# Altium PCB EC200U-PCB.PcbDoc (part 1 of 2)
Units mm, origin at the board's own origin, x right, y up, seen from the top; angles counter-clockwise.
Board outline 86.99 x 89.42 mm, 2 copper layers (Top Layer, Bottom Layer); 142 components, 97 nets, 668 pads, 129 vias.
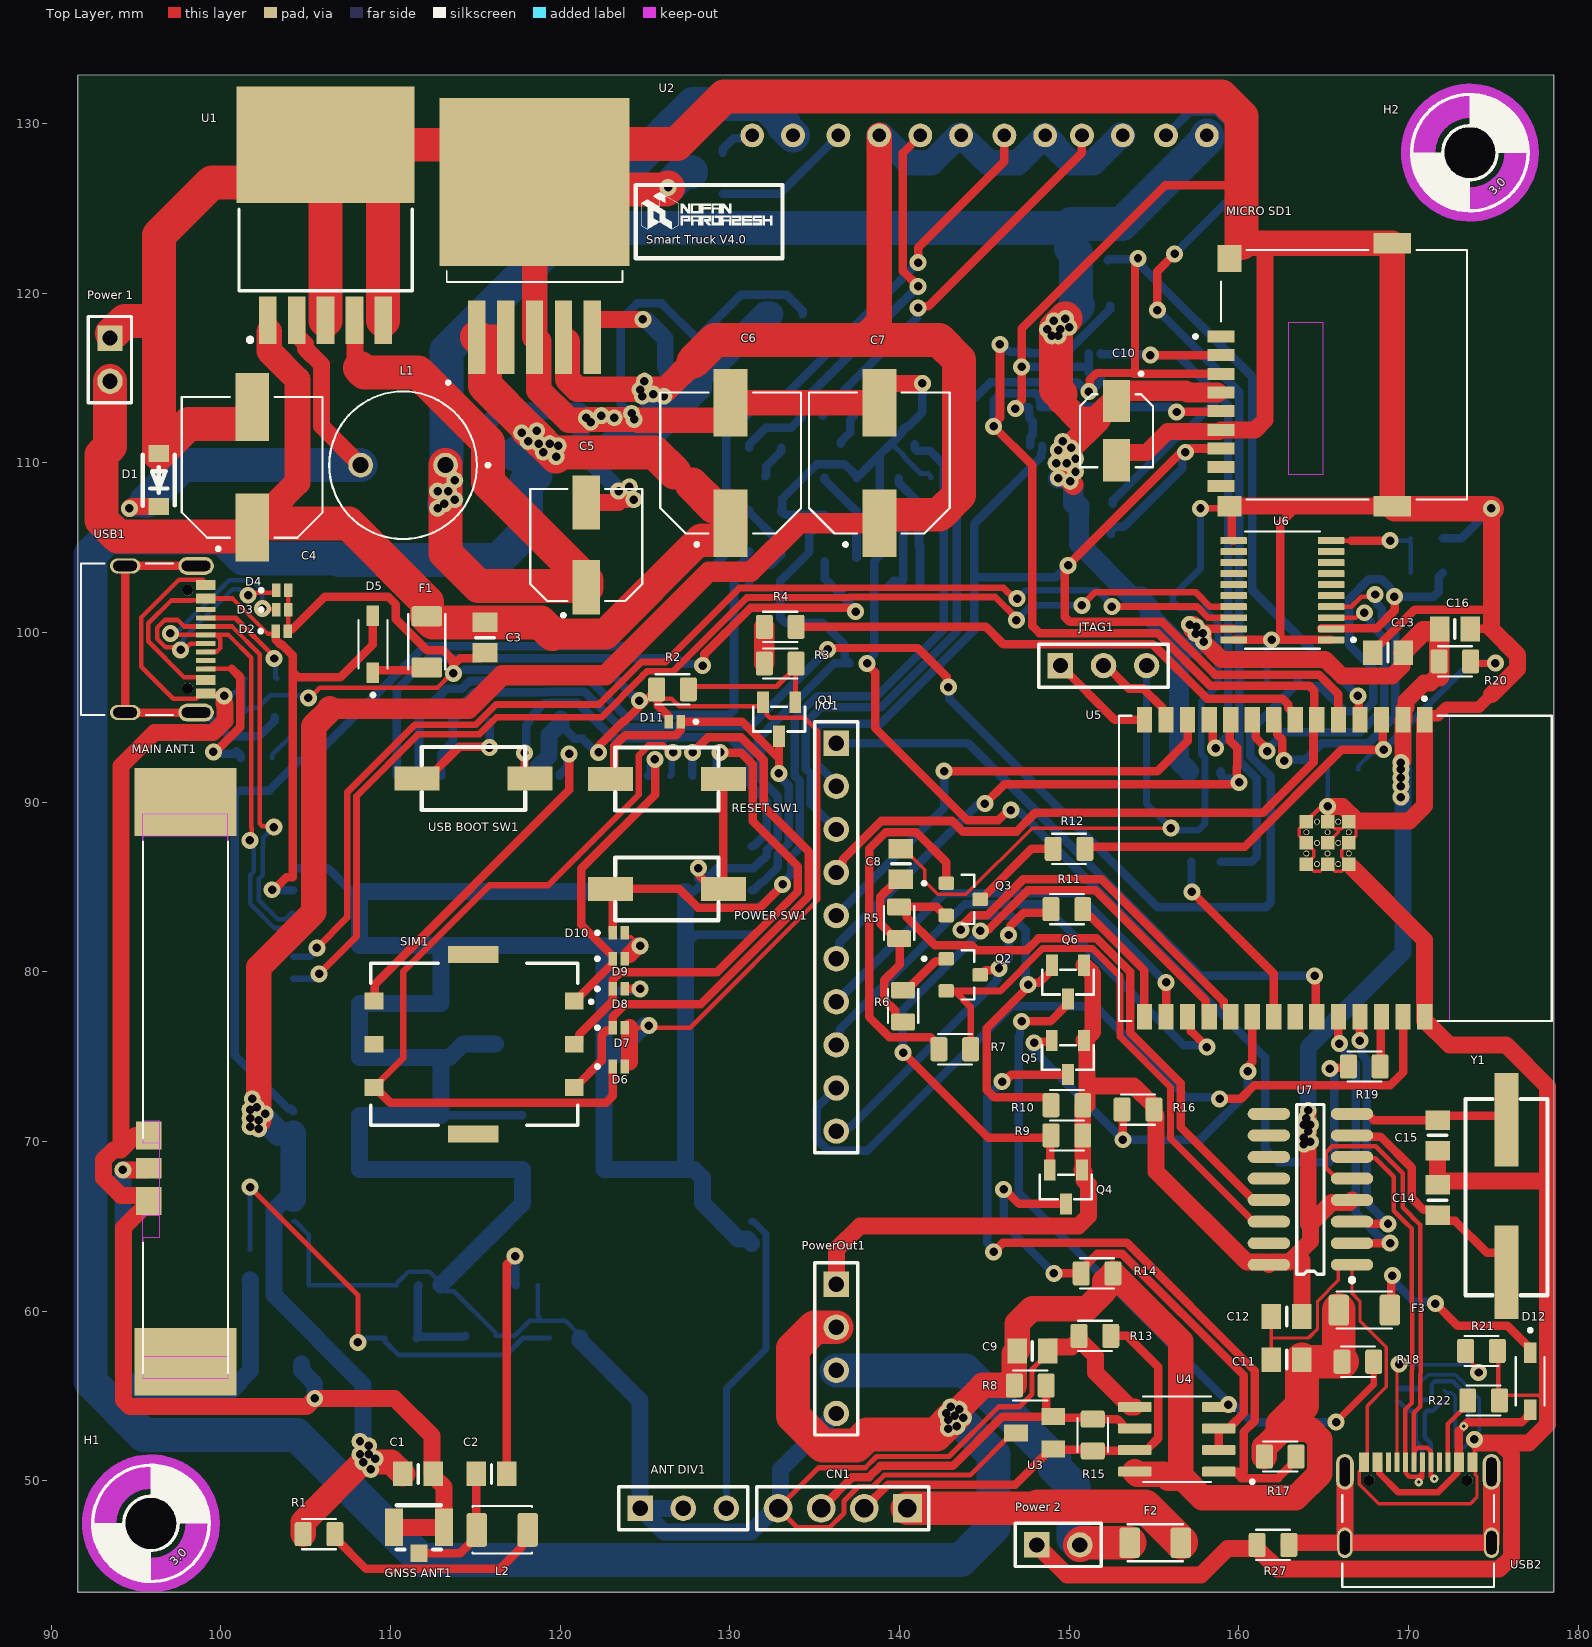
[diagram p0: Top Layer view]
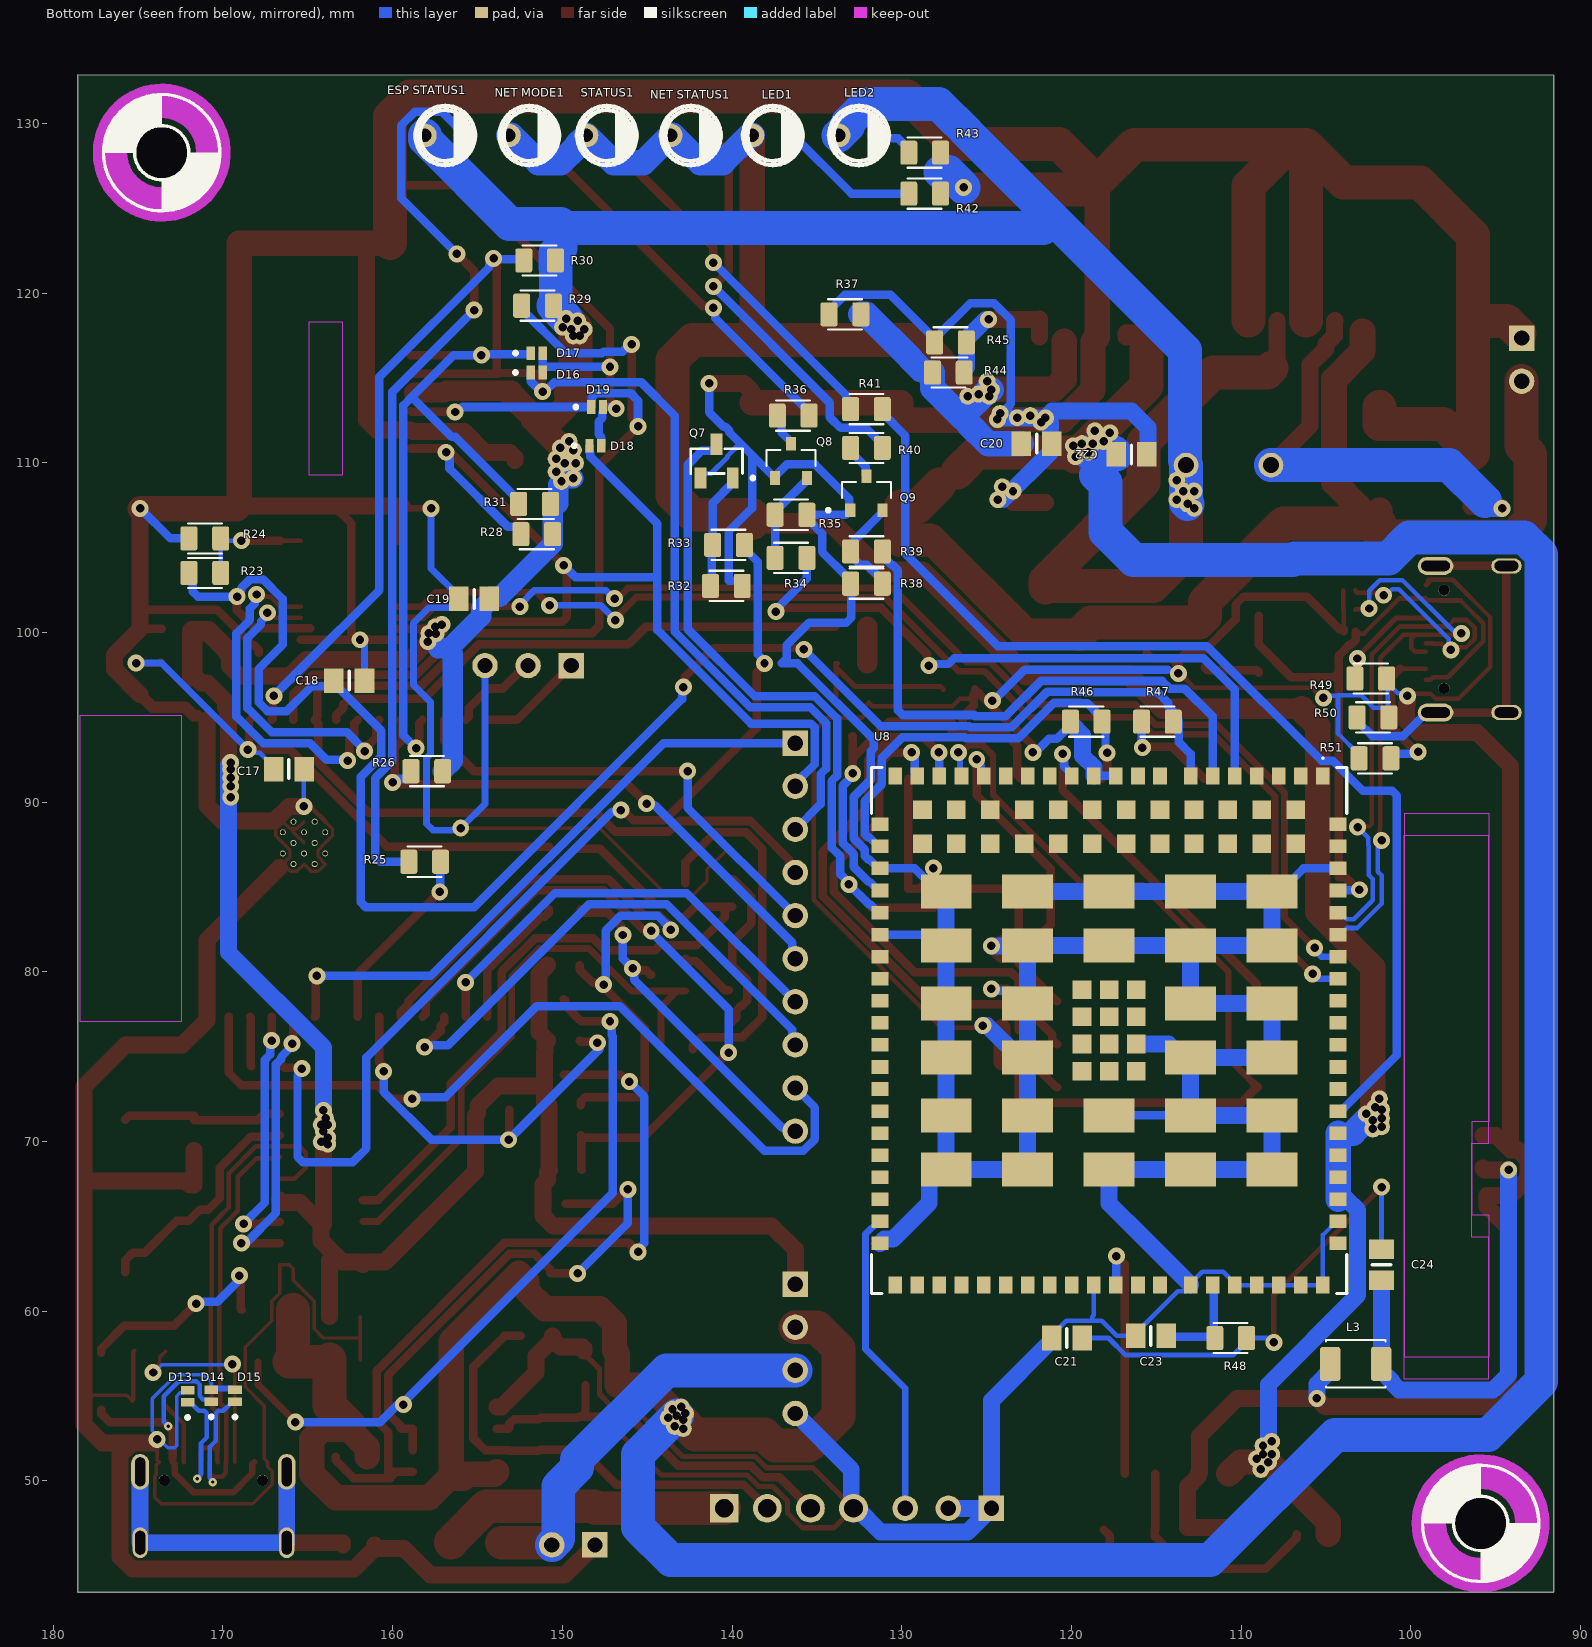
[diagram p1: Bottom Layer view, seen from below]
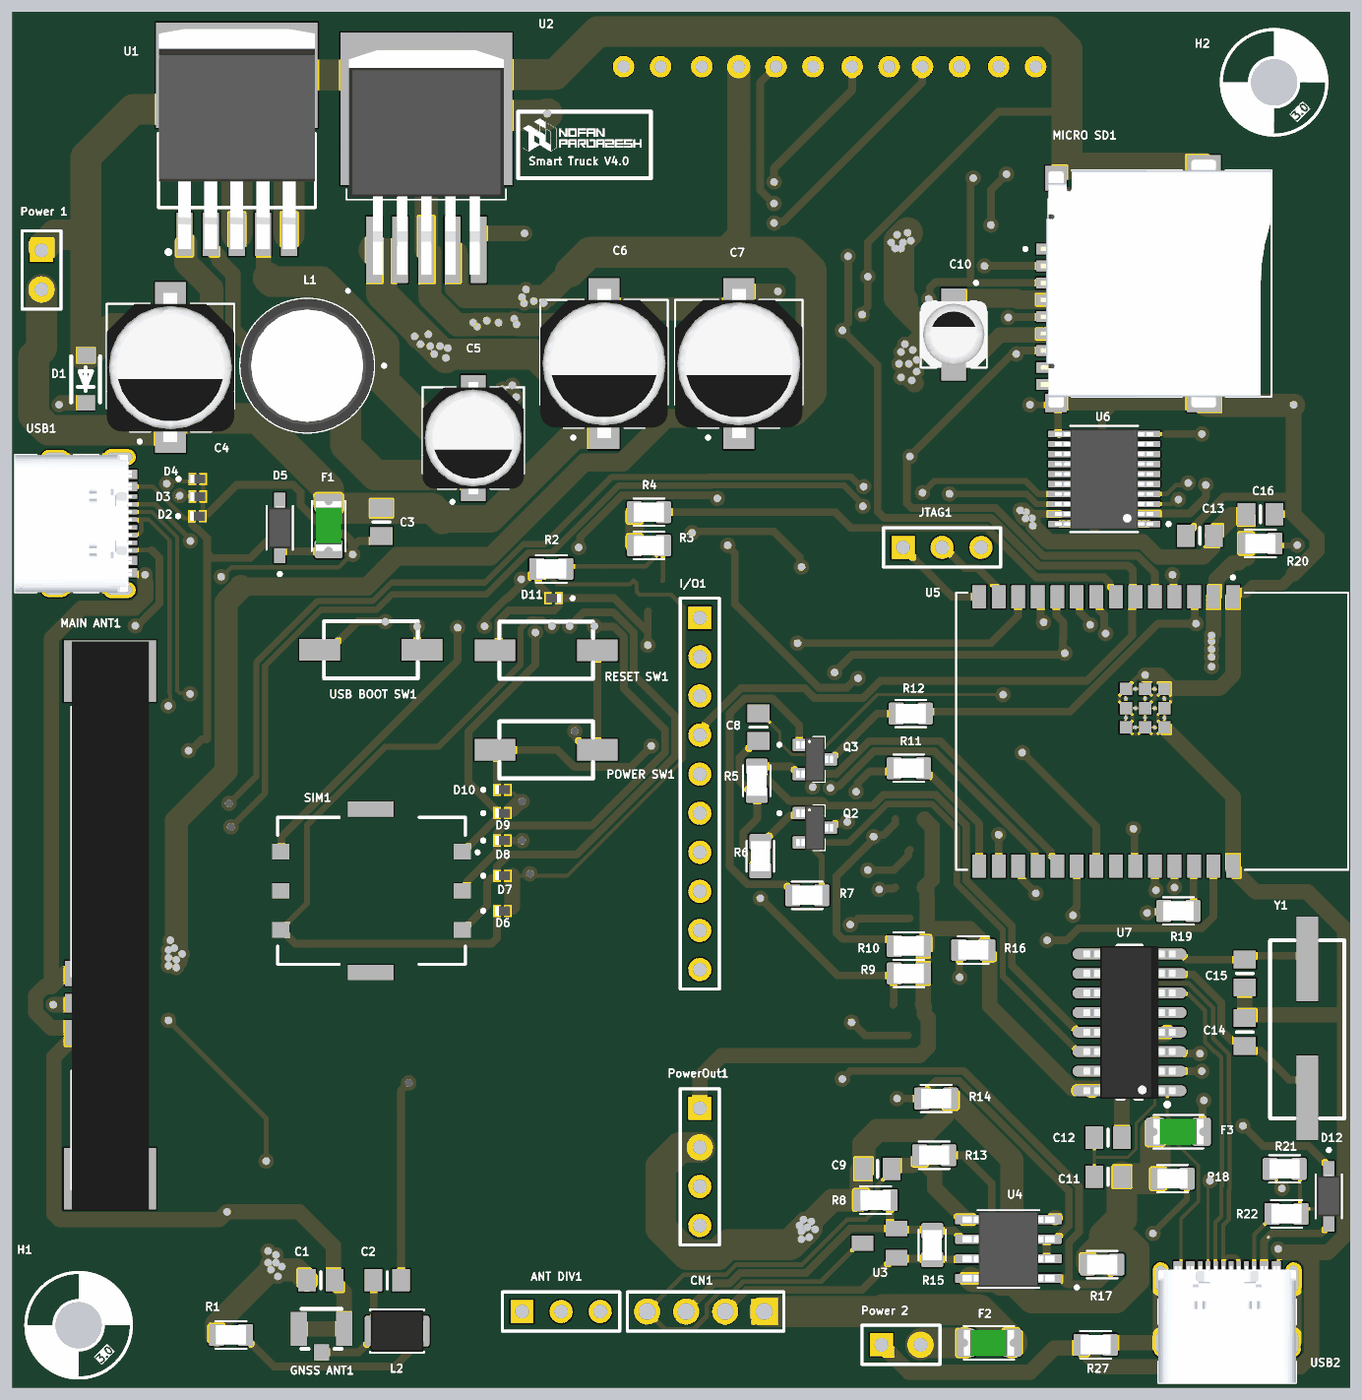
[diagram p3: 3D render of the assembled board from above, using the file's embedded part models]
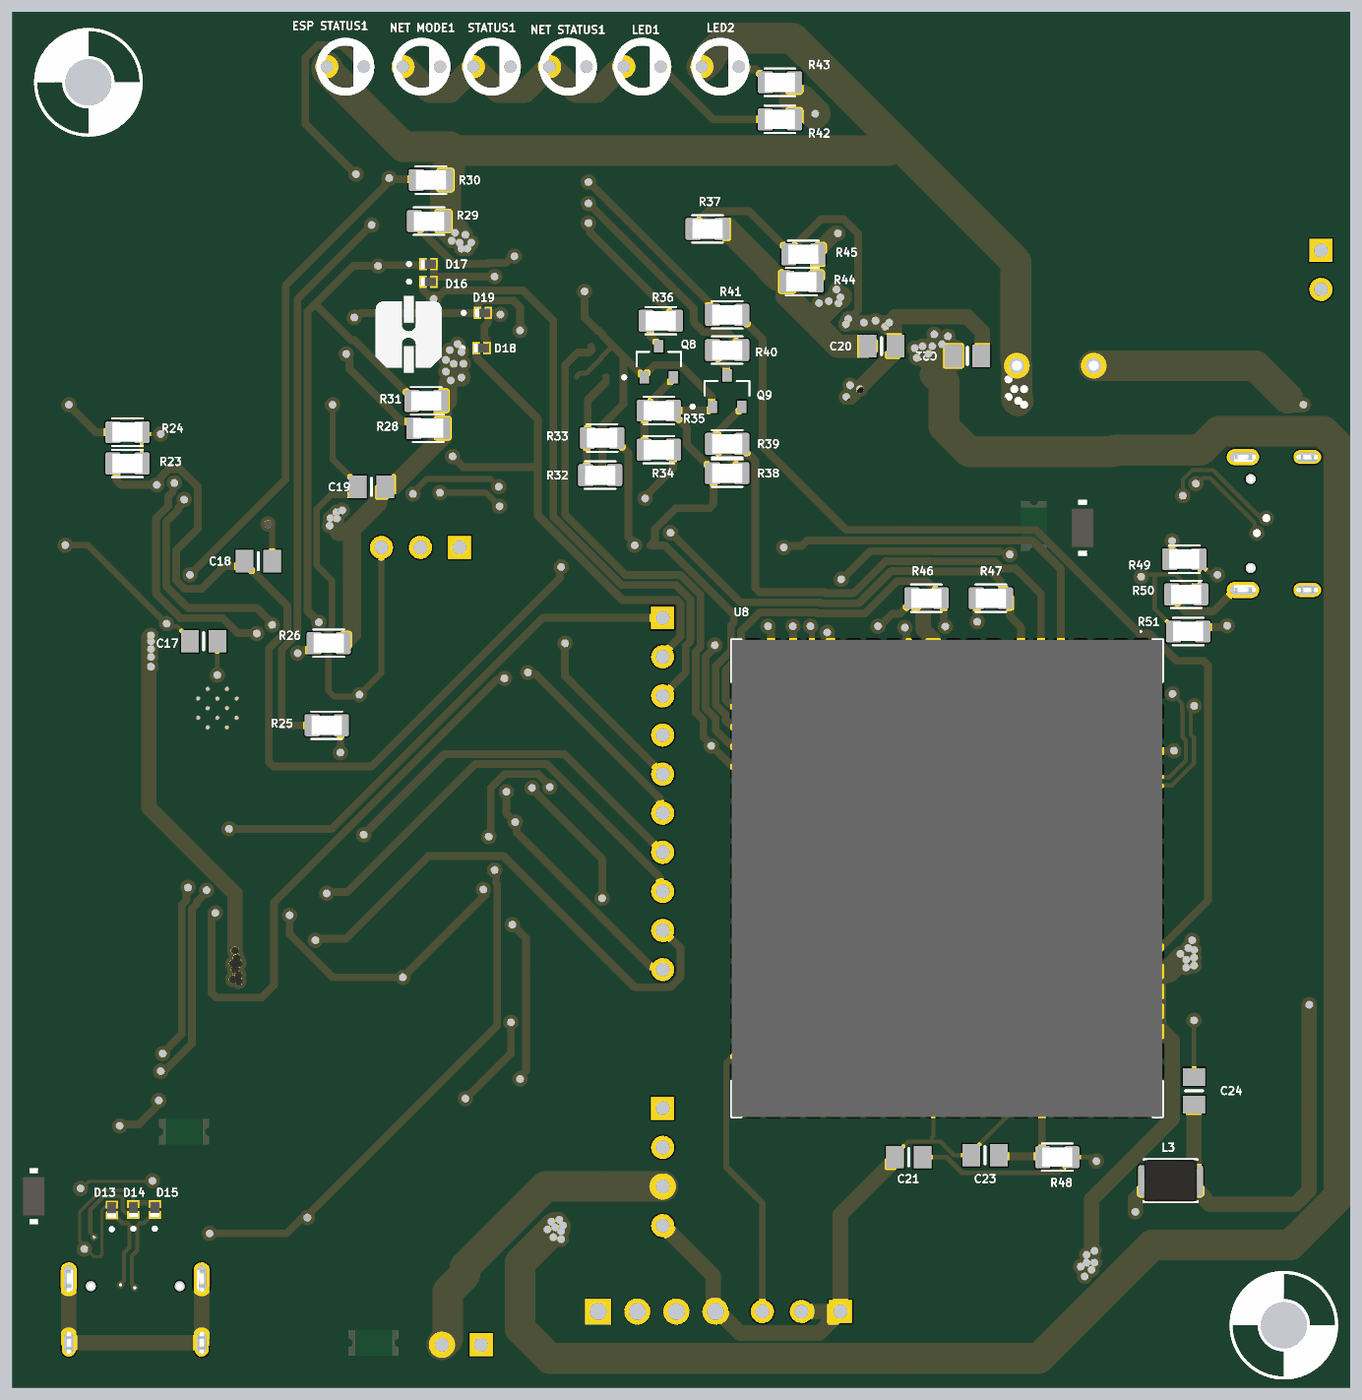
[diagram p4: 3D render of the assembled board from below, using the file's embedded part models]

## Layer stack, top to bottom
Top Solder: solder mask 0.0102, Solder Resist, Dk 3.5
Top Layer: signal copper 0.0356
Dielectric 1: dielectric 0.32, FR-4, Dk 4.8
Bottom Layer: signal copper 0.0356
Bottom Solder: solder mask 0.0102, Solder Resist, Dk 3.5

## Board outline
91.567,132.842 91.567,43.434 178.562,43.434 178.562,132.856

## Design rules (kind name [scope] priority, off if disabled: settings)
Clearance [All] p1: gap=0.15 ignorepadtopadclearanceinfootprint=FALSE except(0.5: Arc-Poly Track-Poly SMDPad-Poly THPad-Poly Via-Poly Fill-Poly Poly-Poly)
DiffPairsRouting [All] p1: maxlimit=0.254 minlimit=0.2 mostfreqgap=0.254 toplayer_minwidth=0.2 toplayer_maxwidth=0.381 toplayer_prefwidth=0.381 bottomlayer_minwidth=0.2 bottomlayer_maxwidth=0.381 bottomlayer_prefwidth=0.381 maxuncoupledlength=12.7
PolygonConnect [All] p1: connectstyle=Direct reliefconductorwidth=0.254 reliefentries=4 polygonreliefangle="90 Angle" airgapwidth=0.254
RoutingVias [All] p1: holewidth=0.5 width=1 viastyle="Through Hole" minholewidth=0.2 minwidth=0.5 maxholewidth=0.711 maxwidth=1.27
SolderMaskExpansion [All] p1: expansion=0.102 istentingtop=FALSE
Width [All] p1: maxlimit=5 minlimit=0.2 preferedwidth=0.267
29 further rules are at their usual default settings.

## Classes and differential pairs
component class "ec200u main": 2 3 4 5 6 7 "ANT DIV1" C1 C3 C4 C5 C6 C8 C11 C14 C15 C18 C20 C23 C33 C35 C37 C? CN1 D2 D4 D6 D10 D12 D14 D15 D16 D17 D18 D19 "ESP STATUS1" F3 "GNSS ANT1" H1 H2 I/O1 IC4 JTAG1 L1 L2 LED2 "MAIN ANT1" "MICRO SD1" "MICRO SD2" "NET STATUS1" "Power 2" "POWER SW1" PowerOut1 PT Q2 Q3 Q6 Q--272_-351 Q--272_-356 Q--272_-363 Q--281_541 Q--291_-335 R2 R3 R4 R6 R7 R10 R14 R15 R16 R17 R20 R24 R26 R28 R33 R36 R37 R39 R41 R42 R43 R44 R45 R46 R48 R50 R51 "RESET SW1" SIM1 STATUS1 U1 U3 U4 U5 U6 U8 USB1 "USB BOOT SW1" Y1 z
differential pair USB3: +USB3_P -USB3_N
differential pair USB2: +USB2_P -USB2_N

## Components (designator, comment, footprint, x,y, rotation, side; value= is the part's Value field where it differs from the comment)
"ANT DIV1" "DIV ANT" HDR1X3 124.714,48.387 r0 top
C1 ".1uF" CAPC2012X140N 111.633,50.419 r180 top (schematic designator C2)
C2 "100pF" CAPC2012X140N 115.951,50.419 r180 top (schematic designator C3)
C3 "10Uf" CAPC2012X140N 115.57,99.695 r90 top (schematic designator C24)
C4 "470uF" CAP_EEEFN1C471P 101.854,109.728 r90 top
C5 "220uF" CAP_EEEFT1C221AL 121.539,105.156 r90 top
C6 "470uF" CAP_EEEFN1C471P 130.048,109.982 r90 top (schematic designator C7)
C7 "470uF" CAP_EEEFN1C471P 138.811,109.982 r90 top (schematic designator C9)
C8 "" CAPC2012X140N 140.081,86.36 r90 top (schematic designator C14)
C9 "100NF" CAPC2012X140N 147.828,57.658 r180 top (schematic designator C6)
C10 "1uF" CAP_EEEFN1H100UR 152.781,111.887 r270 top (schematic designator C15)
C11 "10Uf" CAPC2012X140N 162.814,57.15 r0 top (schematic designator C19)
C12 "100nF" CAPC2012X140N 162.814,59.69 r0 top (schematic designator C18)
C13 "0.1UF" CAPC2012X140N 168.783,98.806 r180 top (schematic designator C12)
C14 "22pf" CAPC2012X140N 171.704,66.548 r90 top (schematic designator C20)
C15 "22pF" CAPC2012X140N 171.704,70.358 r90 top (schematic designator C21)
C16 "10UF" CAPC2012X140N 172.72,100.203 r0 top (schematic designator C13)
C17 "1UF" CAPC2012X140N 166.116,91.948 r180 bottom (schematic designator C11)
C18 "100nF" CAPC2012X140N 162.56,97.155 r0 bottom (schematic designator C16)
C19 "100nF" CAPC2012X140N 155.194,101.981 r180 bottom (schematic designator C17)
C20 "100nF" CAPC2012X140N 122.047,111.125 r0 bottom (schematic designator C10)
C21 "1uF 10V" CAPC2012X140N 120.269,58.42 r180 bottom (schematic designator C22)
C22 "100nF" CAPC2012X140N 116.459,110.49 r0 bottom (schematic designator C8)
C23 "1uF 10V" CAPC2012X140N 115.316,58.547 r180 bottom
C24 "3PF" CAPC2012X140N 101.727,62.738 r90 bottom (schematic designator C1)
CN1 "1759033" PCBComponent_1#1 137.008,48.362 r180 top
D1 "1n5822" PCBComponent_1#2 95.885,110.109 r90 top (schematic designator D3)
D2 "PESD5V0S1BL,315" DIO_PESD5V0S1UL,315 103.601,100.076 r0 top (schematic designator D19)
D3 "PESD5V0S1BL,315" DIO_PESD5V0S1UL,315 103.632,101.346 r0 top (schematic designator D18)
D4 "PESD5V0S1BL,315" DIO_PESD5V0S1UL,315 103.632,102.489 r0 top (schematic designator D17)
D5 "1N5819HW-7-F" SOD3715X145N 108.966,99.314 r90 top (schematic designator D16)
D6 "PESD5V0S1BL,315" DIO_PESD5V0S1UL,315 123.444,74.422 r0 top
D7 "PESD5V0S1BL,315" DIO_PESD5V0S1UL,315 123.444,76.708 r0 top (schematic designator D5)
D8 "PESD5V0S1BL,315" DIO_PESD5V0S1UL,315 123.444,78.994 r0 top (schematic designator D4)
D9 "PESD5V0S1BL,315" DIO_PESD5V0S1UL,315 123.444,80.772 r0 top (schematic designator D7)
D10 "PESD5V0S1BL,315" DIO_PESD5V0S1UL,315 123.444,82.296 r0 top (schematic designator D1)
D11 "PESD5V0S1BL,315" DIO_PESD5V0S1UL,315 126.746,94.742 r180 top (schematic designator D2)
D12 "1N5819HW-7-F" SOD3715X145N 177.165,55.88 r270 top
D13 "PESD5V0S1BL,315" DIO_PESD5V0S1UL,315 172.085,54.991 r90 bottom (schematic designator D14)
D14 "PESD5V0S1BL,315" DIO_PESD5V0S1UL,315 170.688,55.022 r90 bottom (schematic designator D15)
D15 "PESD5V0S1BL,315" DIO_PESD5V0S1UL,315 169.291,55.022 r90 bottom (schematic designator D13)
D16 "PESD5V0S1BL,315" DIO_PESD5V0S1UL,315 151.511,115.316 r180 bottom (schematic designator D10)
D17 "PESD5V0S1BL,315" DIO_PESD5V0S1UL,315 151.511,116.459 r180 bottom (schematic designator D11)
D18 "PESD5V0S1BL,315" DIO_PESD5V0S1UL,315 148.051,110.998 r180 bottom (schematic designator D8)
D19 "PESD5V0S1BL,315" DIO_PESD5V0S1UL,315 147.955,113.284 r180 bottom (schematic designator D9)
"ESP STATUS1" "Red" PCBComponent_1#3 156.718,129.413 r180 bottom
F1 "F=1.0 A" RESC3216X125N 112.141,99.441 r90 top (schematic designator F3)
F2 "F=4A" RESC3216X125N 155.067,46.355 r180 top (schematic designator F1)
F3 "F=1.0 A" RESC3216X125N 167.386,60.071 r180 top (schematic designator F2)
"GNSS ANT1" "U.FL-R-SMT-1_01_" PCBComponent_1#4 111.506,47.244 r0 top
H1 "HOLE" P3.0 95.885,47.498 r0 top
H2 "HOLE" P3.0 173.609,128.27 r0 top
I/O1 "Header 10" HDR1X10 136.271,93.472 r270 top (schematic designator I/O)
JTAG1 "Header 3" HDR1X3 149.479,98.044 r0 top (schematic designator JTAG)
L1 "DRC-V-822K" IND_DRC-V-821K 110.744,109.855 r180 top (schematic designator L3)
L2 "NLCV32T" INDM3225X240N 116.586,47.117 r0 top value=2µ2
L3 "6.8NH" INDM3225X240N 103.251,56.896 r180 bottom (schematic designator L1)
LED1 "Red" PCBComponent_1#3 137.414,129.413 r180 bottom (schematic designator LED2)
LED2 "Red" PCBComponent_1#3 132.334,129.413 r180 bottom (schematic designator LED1)
"MAIN ANT1" "ANT-LTE-CER-T" XDCR_ANT-LTE-CER-T 97.917,72.009 r270 top
"MICRO SD1" "Micro SD CARD HEADER" AMPHENOL_GTFP08131Y2HR 169.037,115.189 r90 top
"NET MODE1" "Red" PCBComponent_1#3 151.765,129.413 r180 bottom
"NET STATUS1" "Red" PCBComponent_1#3 142.24,129.413 r180 bottom
"Power 1" "Header 2" HDR1X2 93.472,117.348 r270 top (schematic designator "Power 2")
"Power 2" "Header 2" HDR1X2 148.082,46.228 r0 top (schematic designator "Power 1")
"POWER SW1" "Switch PB" PCBComponent_1#5 126.238,84.836 r180 top
PowerOut1 "Header 4" HDR1X4 136.271,61.595 r270 top (schematic designator PowerOut)
Q1 "BSS138" SOT-23-3_L2.9-W1.3-P1.90-LS2.4-BR#1 -288.661,-335.711 r90 top (schematic designator Q4)
Q2 "BC847B" TRANS_BC847B 143.748,79.822 r0 top (schematic designator Q8)
Q3 "BC847B" TRANS_BC847B 143.748,84.267 r0 top (schematic designator Q9)
Q4 "BSS138" SOT-23-3_L2.9-W1.3-P1.90-LS2.4-BR#1 -271.765,-363.27 r90 top (schematic designator Q5)
Q5 "BSS138" SOT-23-3_L2.9-W1.3-P1.90-LS2.4-BR#1 -271.643,-355.65 r90 top (schematic designator Q6)
Q6 "BSS138" SOT-23-3_L2.9-W1.3-P1.90-LS2.4-BR#1 -271.638,-351.205 r90 top (schematic designator Q7)
Q7 "BSS138" SOT-23-3_L2.9-W1.3-P1.90-LS2.4-BR#2 -280.655,540.689 r270 bottom (schematic designator Q3)
Q8 "S8050" TRANS_SS8050-G 136.525,110.109 r90 bottom (schematic designator Q2)
Q9 "S8050" TRANS_SS8050-G 132.08,108.204 r90 bottom (schematic designator Q1)
R1 "10" RESC2012X65N 105.791,46.863 r180 top (schematic designator R3)
R2 "47K" RESC2012X65N 126.619,96.647 r180 top (schematic designator R19)
R3 "47K" RESC2012X65N 132.969,98.171 r0 top (schematic designator R18)
R4 "0" RESC2012X65N 132.969,100.33 r180 top (schematic designator R30)
R5 "10K" RESC2012X65N 139.976,82.885 r90 top (schematic designator R36)
R6 "0" RESC2012X65N 140.208,77.978 r270 top (schematic designator R35)
R7 "10K" RESC2012X65N 143.256,75.438 r0 top (schematic designator R34)
R8 "10K" RESC2012X65N 147.701,55.626 r180 top (schematic designator R24)
R9 "10K" RESC2012X65N 149.86,70.358 r180 top (schematic designator R16)
R10 "1K" RESC2012X65N 149.86,72.136 r180 top (schematic designator R28)
R11 "0" RESC2012X65N 149.86,83.693 r0 top (schematic designator R33)
R12 "0" RESC2012X65N 149.987,87.249 r180 top (schematic designator R32)
R13 "10K" RESC2012X65N 151.511,58.547 r0 top (schematic designator R10)
R14 "10K" RESC2012X65N 151.638,62.23 r180 top (schematic designator R15)
R15 "120" RESC2012X65N 151.384,52.705 r90 top (schematic designator R17)
R16 "1K" RESC2012X65N 154.051,71.882 r180 top (schematic designator R26)
R17 "4.7K" RESC2012X65N 162.433,51.435 r0 top (schematic designator R11)
R18 "4.7K" RESC2012X65N 167.005,57.023 r0 top (schematic designator R13)
R19 "0" RESC2012X65N 167.386,74.422 r0 top (schematic designator R29)
R20 "10K" RESC2012X65N 172.72,98.298 r180 top (schematic designator R27)
R21 "5.1K" RESC2012X65N 174.29,57.658 r0 top (schematic designator R44)
R22 "5.1K" RESC2012X65N 174.417,54.737 r180 top (schematic designator R43)
R23 "10K" RESC2012X65N 171.069,103.505 r0 bottom (schematic designator R42)
R24 "120K" RESC2012X65N 171.069,105.537 r0 bottom (schematic designator R41)
R25 "330" RESC2012X65N 158.115,86.487 r180 bottom (schematic designator R22)
R26 "3.3K" RESC2012X65N 157.988,91.821 r0 bottom (schematic designator R31)
R27 "0" RESC2012X65N 162.006,46.228 r180 top (schematic designator R45)
R28 "4.7K" RESC2012X65N 151.511,105.791 r180 bottom (schematic designator R38)
R29 "4.7K" RESC2012X65N 151.465,119.253 r180 bottom (schematic designator R39)
R30 "4.7K" RESC2012X65N 151.338,121.92 r180 bottom (schematic designator R40)
R31 "4.7K" RESC2012X65N 151.638,107.569 r180 bottom (schematic designator R37)
R32 "47K" RESC2012X65N 140.335,102.743 r180 bottom (schematic designator R14)
R33 "47K" RESC2012X65N 140.208,105.156 r0 bottom (schematic designator R12)
R34 "4.7K" RESC2012X65N 136.525,104.394 r0 bottom (schematic designator R7)
R35 "47K" RESC2012X65N 136.525,106.934 r180 bottom (schematic designator R9)
R36 "2.2K" RESC2012X65N 136.398,112.776 r180 bottom (schematic designator R5)
R37 "330" RESC2012X65N 133.35,118.745 r180 bottom (schematic designator R21)
R38 "47K" RESC2012X65N 132.08,102.87 r0 bottom (schematic designator R6)
R39 "4.7K" RESC2012X65N 132.08,104.775 r0 bottom (schematic designator R4)
R40 "2.2K" RESC2012X65N 132.08,110.871 r180 bottom (schematic designator R2)
R41 "2.2K" RESC2012X65N 132.08,113.157 r0 bottom (schematic designator R1)
R42 "330" RESC2012X65N 128.651,125.857 r0 bottom (schematic designator R23)
R43 "330" RESC2012X65N 128.651,128.27 r0 bottom (schematic designator R8)
R44 "100K" RESC2012X65N 127.254,115.316 r0 bottom (schematic designator R20)
R45 "100K" RESC2012X65N 127.127,117.094 r180 bottom (schematic designator R25)
R46 "0" RESC2012X65N 119.126,94.742 r180 bottom (schematic designator R47)
R47 "4.7K" RESC2012X65N 114.935,94.742 r0 bottom (schematic designator R46)
R48 "0" RESC2012X65N 110.617,58.42 r0 bottom
R49 "5.1K" RESC2012X65N 102.362,97.282 r180 bottom (schematic designator R50)
R50 "0" RESC2012X65N 102.235,94.996 r180 bottom (schematic designator R51)
R51 "5.1K" RESC2012X65N 102.108,92.583 r180 bottom (schematic designator R49)
"RESET SW1" "Switch PB" PCBComponent_1#5 126.238,91.313 r180 top
SIM1 "SIM8051-6-0-14-00-X-REVD" PCBComponent_1#6 115.443,76.073 r90 top
STATUS1 "Red" PCBComponent_1#3 147.193,129.413 r180 bottom
U1 "LM2596S-3.3_NOPB" TO170P1435X465-6N 106.172,124.587 r90 top
U2 "MIC29302WU-TR" MIC29302WUTR 118.491,123.063 r0 top (schematic designator U3)
U3 "SM712" SOT23 147.955,52.832 r90 top (schematic designator U4)
U4 "MAX485" SOIC127P600X175-8N 156.337,52.451 r180 top (schematic designator U2)
U5 "ESP32-C6-WROOM-1-N8" XCVR_ESP32-C6-WROOM-1-N8 165.682,86.093 r270 top
U6 "TXS0108EPWR" SOP65P640X120-20N 162.56,102.489 r180 top
U7 "" SO16_M 164.211,67.183 r180 top (schematic designator U8)
U8 "EC200UCNAA-N05-SGNSA" EC200UCNAAN05SGNSA 117.78,76.543 r270 bottom (schematic designator U7)
USB1 "USB TYPE C 16 PIN" AMPHENOL_10155435-00011LF 94.364,99.599 r270 top (schematic designator USB2)
USB2 "USB TYPE C 16 PIN" AMPHENOL_10155435-00011LF 170.561,46.355 r0 top (schematic designator USB1)
"USB BOOT SW1" "Switch PB" PCBComponent_1#5 114.935,91.44 r0 top
Y1 "12 MHz" PCBComponent_1#7 176.022,66.675 r270 top

## Footprints (in the part's own frame and the unit in brackets; to place one, negate y for a bottom-side part, rotate by r counter-clockwise, add the part's x,y. Pads: shape width x height; smd on the part's side, far side on the other; paste and mask are expansions set on the pad)
AMPHENOL_10155435-00011LF [mm]
  rect 0.6x1.14 smd: A1_B12(-3.2,4.75) A4_B9(-2.4,4.75) B1_A12(3.2,4.75) B4_A9(2.4,4.75)
  rect 0.3x1.14 smd: A5(-1.25,4.75) A6(-0.25,4.75) A7(0.25,4.75) A8(1.25,4.75) B5(1.75,4.75) B6(0.75,4.75) B7(-0.75,4.75) B8(-1.75,4.75)
  oval 1.05x2.1 hole 0.6 slot 1.7 at 90 deg: SH1(-4.32,4.18) SH2(4.32,4.18)
  oval 0.9x1.8 hole 0.6 slot 1.4 at 90 deg: SH3(-4.32,0) SH4(4.32,0)
  round 0.65 hole 0.65 unplated: ""(-2.89,3.68) ""(2.89,3.68)
  silkscreen extent -4.47,-2.6 4.47,2.81, body extent -4.47,-2.6 4.47,5, height 3.26
AMPHENOL_GTFP08131Y2HR [mm]
  rect 0.7x1.6 smd: 1(2.25,10.1) 2(1.15,10.1) 3(0.05,10.1) 4(-1.05,10.1) 5(-2.15,10.1) 6(-3.25,10.1) 7(-4.35,10.1) 8(-5.45,10.1) CD(-6.55,10.1)
  rect 1.2x1.4 smd: 10(-7.75,9.6)
  rect 1.6x1.4 smd: 11(6.85,9.6)
  rect 1.2x2.2 smd: 12(-7.75,0) 13(7.75,0)
  Keep-Out Layer region: 3.1,4.1 -5.9,4.1 -5.9,6.1 3.1,6.1
  silkscreen extent -7.35,-4.4 7.35,11.7, body extent -8.05,-4.4 8.05,10.6, height 1.9
CAP_EEEFN1C471P [mm]
  rect 4x2 smd: 1(-3.55,0) 2(3.55,0)
  silkscreen extent -4.9,-4.15 4.15,4.15, body extent -4.85,-4.15 4.85,4.15, height 10.2
CAP_EEEFN1H100UR [mm]
  rect 2.5x1.6 smd: 1(-1.75,0) 2(1.75,0)
  silkscreen extent -3.45,-2.15 2.15,2.15, body extent -2.5,-2.15 2.5,2.15, height 5.3
CAP_EEEFT1C221AL [mm]
  rect 3.2x1.6 smd: 1(-2.5,0) 2(2.5,0)
  silkscreen extent -4.25,-3.3 3.3,3.3, body extent -3.65,-3.3 3.65,3.3, height 5.8
CAPC2012X140N [mm]
  rect 1.15x1.45 smd: 1(-0.9,0) 2(0.9,0)
  silkscreen extent 0,-0.55 0,0.55
DIO_PESD5V0S1UL,315 [mm]
  rect 0.5x0.8 smd paste-0.1 mask+0: 1(0.35,0) 2(-0.35,0)
  silkscreen extent -1.35,-0.1 -1.15,0.1, body extent -0.49,-0.29 0.49,0.29, height 0.5
EC200UCNAAN05SGNSA [mm]
  rect 1x0.8 smd: 1(-15,12.6) 2(-15,11.3) 3(-15,10) 4(-15,8.7) 5(-15,7.4) 6(-15,6.1) 7(-15,4.8) 8(-15,0.4) 9(-15,-0.9) 10(-15,-2.2) 11(-15,-3.5) 12(-15,-4.8) 13(-15,-6.1) 14(-15,-7.4) 15(-15,-8.7) 16(-15,-10) 17(-15,-11.3) 18(-15,-12.6) 37(15,-12.6) 38(15,-11.3) 39(15,-10) 40(15,-8.7) 41(15,-7.4) 42(15,-6.1) 43(15,-4.8) 44(15,-3.5) 45(15,-2.2) 46(15,-0.9) 47(15,0.4) 48(15,4.8) 49(15,6.1) 50(15,7.4) 51(15,8.7) 52(15,10) 53(15,11.3) 54(15,12.6) 141(-15,3) 142(-15,1.7) 143(15,1.7) 144(15,3)
  rect 0.8x1 smd: 19(-9.55,-13.5) 20(-8.25,-13.5) 21(-6.95,-13.5) 22(-5.65,-13.5) 23(-4.35,-13.5) 24(-3.05,-13.5) 25(-1.75,-13.5) 26(-0.45,-13.5) 27(0.85,-13.5) 28(2.15,-13.5) 29(3.45,-13.5) 30(4.75,-13.5) 31(6.05,-13.5) 32(7.35,-13.5) 33(8.65,-13.5) 34(9.95,-13.5) 35(11.25,-13.5) 36(12.55,-13.5) 55(12.55,13.5) 56(11.25,13.5) 57(9.95,13.5) 58(8.65,13.5) 59(7.35,13.5) 60(6.05,13.5) 61(4.75,13.5) 62(3.45,13.5) 63(2.15,13.5) 64(0.85,13.5) 65(-0.45,13.5) 66(-1.75,13.5) 67(-3.05,13.5) 68(-4.35,13.5) 69(-5.65,13.5) 70(-6.95,13.5) 71(-8.25,13.5) 72(-9.55,13.5) 113(-10.85,13.5) 114(-12.15,13.5) 115(-10.85,-13.5) 116(-12.15,-13.5)
  rect 1.1x1.1 smd: 73(2.4,1.6) 74(2.4,0) 75(2.4,-1.6) 76(0.8,1.6) 77(0.8,0) 78(0.8,-1.6) 79(-0.8,1.6) 80(-0.8,0) 81(-0.8,-1.6) 82(-2.4,1.6) 83(-2.4,0) 84(-2.4,-1.6) 117(-11,11) 118(-11,9) 119(-11,7) 120(-11,5) 121(-11,3) 122(-11,1) 123(-11,-1) 124(-11,-3) 125(-11,-5) 126(-11,-7) 127(-11,-9) 128(-11,-11) 129(-13,11) 130(-13,9) 131(-13,7) 132(-13,5) 133(-13,3) 134(-13,1) 135(-13,-1) 136(-13,-3) 137(-13,-5) 138(-13,-7) 139(-13,-9) 140(-13,-11)
  rect 2x3 smd: 85(8.2,9.6) 86(8.2,4.8) 87(8.2,0) 88(8.2,-4.8) 89(8.2,-9.6) 90(5,9.6) 91(5,4.8) 92(5,0) 93(5,-4.8) 94(5,-9.6) 95(1.6,9.6) 96(1.6,4.8) 97(1.6,-4.8) 98(1.6,-9.6) 99(-1.6,9.6) 100(-1.6,4.8) 101(-1.6,-4.8) 102(-1.6,-9.6) 103(-5,9.6) 104(-5,4.8) 105(-5,0) 106(-5,-4.8) 107(-5,-9.6) 108(-8.2,9.6) 109(-8.2,4.8) 110(-8.2,0) 111(-8.2,-4.8) 112(-8.2,-9.6)
  silkscreen extent -16.1,-14 15.5,14, body extent -15.5,-14 15.5,14, height 2.7
HDR1X2 [mm] "Connector; Header; 2 Position"
  rect 1.5x1.5 hole 0.9: 1(0,0)
  round 1.5 hole 0.9: 2(2.54,0)
  silkscreen extent -1.27,-1.27 3.81,1.27
HDR1X3 [mm] "Connector; Header; 3 Position"
  rect 1.5x1.5 hole 0.9: 1(0,0)
  round 1.5 hole 0.9: 2(2.54,0) 3(5.08,0)
  silkscreen extent -1.27,-1.27 6.35,1.27
HDR1X4 [mm] "Connector; Header; 4 Position"
  rect 1.5x1.5 hole 0.9: 1(0,0)
  round 1.5 hole 0.9: 2(2.54,0) 3(5.08,0) 4(7.62,0)
  silkscreen extent -1.27,-1.27 8.89,1.27
HDR1X10 [mm] "Connector; Header; 10 Position"
  rect 1.5x1.5 hole 0.9: 1(0,0)
  round 1.5 hole 0.9: 2(2.54,0) 3(5.08,0) 4(7.62,0) 5(10.16,0) 6(12.7,0) 7(15.24,0) 8(17.78,0) 9(20.32,0) 10(22.86,0)
  silkscreen extent -1.27,-1.27 24.13,1.27
IND_DRC-V-821K [mm]
  round 1.458 hole 0.95: 1(-2.5,0) 2(2.5,0)
  silkscreen extent -5.1,-4.35 4.35,4.35, body extent -4.35,-4.35 4.35,4.35, height 12.5
INDM3225X240N [mm] "Molded Inductor, 2-Leads, Body 3.2x2.5mm, IPC Medium Density"
  round 0.508 on Mech15: 0(0,0)
  rrect25% 1.2x2 smd: 1(-1.5,0) 2(1.5,0)
  silkscreen extent -1.75,-1.4 1.75,1.4, body extent -1.79,-1.35 1.79,1.35, height 2.4
MIC29302WUTR [mm]
  rect 1.02x4.318 smd: 1(-3.4,-5.664) 2(-1.7,-5.664) 3(0,-5.664) 4(1.7,-5.664) 5(3.4,-5.664)
  rect 11.176x9.906 smd: 6(0,3.482)
  silkscreen extent -5.18,-8.43 5.18,-1.74, body extent -5.03,-7.31 5.03,7.3, height 4.42
P3.0 [mm] "MOUNTING HOLE 3.0 mm with drill center"
  round 0 hole 3 unplated: MH(0,0)
  Keep-Out Layer circle w2.032: c0,0 r3.048
  silkscreen extent -3.43,-3.43 3.43,3.43
PCBComponent_1#1 [mm]
  rect 1.7x1.7 hole 1.1 paste+0 mask+0.051: 1(-3.454,-0.025)
  round 1.7 hole 1.1 paste+0 mask+0.051: 2(-0.914,-0.025) 3(1.626,-0.025) 4(4.166,-0.025)
  silkscreen extent -4.72,-1.3 5.44,1.24
PCBComponent_1#2 [mm]
  rect 1x1.2 smd paste+0 mask+0.051: A(0.425,-0.464) K(-2.675,-0.464)
  silkscreen extent -2.65,-1.4 0.37,0.48
PCBComponent_1#3 [mm]
  round 1.4 hole 0.8 paste+0 mask+0.051: 1(-1.387,-0.127) 2(1.016,-0.127)
  silkscreen extent -1.93,-1.88 1.57,1.62
PCBComponent_1#4 [mm]
  rect 1.05x2.2 smd paste+0 mask+0.051: 1(-1.306,0.018) 2(1.644,0.018)
  rect 1x1.05 smd paste+0 mask+0.051: 3(0.169,-1.507)
  silkscreen extent -1.13,-1.28 1.47,1.32
PCBComponent_1#5 [mm]
  rect 2.649x1.4 smd: 1(-3.374,-0.051) 2(3.28,-0.051)
  silkscreen extent -3.09,-1.91 3,1.8
PCBComponent_1#6 [mm]
  rect 1x1.1 smd paste+0 mask+0.051: C1(2.199,-5.385) C2(-0.341,-5.385) C3(-2.881,-5.385) C5(2.199,6.415) C6(-0.341,6.415) C7(-2.881,6.415)
  rect 1x3 smd paste+0 mask+0.051: MP1(4.959,0.565) MP2(-5.641,0.565)
  silkscreen extent -5.11,-6.48 4.43,6.62
PCBComponent_1#7 [mm]
  rect 5.5x1.4 smd paste+0 mask+0.051: 1(-4.616,-0.254) 2(4.384,-0.254)
  silkscreen extent -5.83,-2.67 5.73,2.16
RESC2012X65N [mm]
  rrect25% 1x1.42 smd: 1(-0.935,0) 2(0.935,0)
  silkscreen extent -1,-0.89 1,0.89, body extent -1,-0.63 1,0.63, height 0.6
RESC3216X125N [mm]
  rrect25% 1.2x1.82 smd: 1(-1.505,0) 2(1.505,0)
  silkscreen extent -1.63,-1.09 1.63,1.09, body extent -1.63,-0.82 1.63,0.82, height 0.43
SO16_M [mm]
  oval 2.5x0.7 smd: 1(-2.45,4.445) 2(-2.45,3.175) 3(-2.45,1.905) 4(-2.45,0.635) 5(-2.45,-0.635) 6(-2.45,-1.905) 7(-2.45,-3.175) 8(-2.45,-4.445) 9(2.45,-4.445) 10(2.45,-3.175) 11(2.45,-1.905) 12(2.45,-0.635) 13(2.45,0.635) 14(2.45,1.905) 15(2.45,3.175) 16(2.45,4.445)
  silkscreen extent -2.58,-5 0.8,5.47, body extent -3,-4.97 3,4.96, height 1.62
SOD3715X145N [mm]
  rect 1.21x0.73 smd: A(1.68,0) C(-1.68,0)
  silkscreen extent -3.1,-0.85 1.43,0.85, body extent -1.83,-0.77 1.83,0.77, height 0.8
SOIC127P600X175-8N [mm]
  rrect25% 1.97x0.59 smd: 1(-2.475,1.905) 2(-2.475,0.635) 3(-2.475,-0.635) 4(-2.475,-1.905) 5(2.475,-1.905) 6(2.475,-0.635) 7(2.475,0.635) 8(2.475,1.905)
  silkscreen extent -4.54,-2.52 2,2.59, body extent -3,-2.45 3,2.45, height 1.75
SOP65P640X120-20N [mm]
  rrect25% 1.57x0.41 smd: 1(-2.87,2.925) 2(-2.87,2.275) 3(-2.87,1.625) 4(-2.87,0.975) 5(-2.87,0.325) 6(-2.87,-0.325) 7(-2.87,-0.975) 8(-2.87,-1.625) 9(-2.87,-2.275) 10(-2.87,-2.925) 11(2.87,-2.925) 12(2.87,-2.275) 13(2.87,-1.625) 14(2.87,-0.975) 15(2.87,-0.325) 16(2.87,0.325) 17(2.87,0.975) 18(2.87,1.625) 19(2.87,2.275) 20(2.87,2.925)
  silkscreen extent -4.29,-3.45 2.2,3.45, body extent -3.2,-3.25 3.2,3.25, height 1.2
SOT23 [mm]
  rect 1x1.4 smd: 1(-0.95,-1.1) 2(0.95,-1.1) 3(0,1.1)
SOT-23-3_L2.9-W1.3-P1.90-LS2.4-BR#1 [mm]
  rect 1.25x0.7 smd: 1(431.596,-422.514) 2(431.596,-420.614) 3(429.597,-421.564)
  silkscreen extent 429.87,-423.09 431.32,-420.04
SOT-23-3_L2.9-W1.3-P1.90-LS2.4-BR#2 [mm]
  rect 1.25x0.7 smd: 1(431.596,-420.614) 2(431.596,-422.514) 3(429.597,-421.564)
  silkscreen extent 429.87,-423.09 431.32,-420.04
TO170P1435X465-6N [mm]
  rect 2.8x1.05 smd: 1(-6.2,3.4) 2(-6.2,1.7) 3(-6.2,0) 4(-6.2,-1.7) 5(-6.2,-3.4)
  rect 6.85x10.5 smd: 6(4.15,0)
  silkscreen extent -7.47,-5.1 0.35,5.1, body extent -7.16,-5.08 7.14,5.08, height 4.72
TRANS_BC847B [mm]
  rrect25% 0.9x0.8 smd: 1(-1,0.95) 2(-1,-0.95) 3(1,0)
  silkscreen extent -2.4,-1.45 0.65,1.45, body extent -1.2,-1.46 1.2,1.46, height 1.2
TRANS_SS8050-G [mm]
  rect 0.8x0.6 smd: 1(-1.01,-0.95) 2(-1.01,0.95) 3(1.01,0)
  silkscreen extent -1.11,-1.45 0.65,2.35
XCVR_ESP32-C6-WROOM-1-N8 [mm]
  rect 1.5x0.9 smd: 1(-8.75,5.26) 2(-8.75,3.99) 3(-8.75,2.72) 4(-8.75,1.45) 5(-8.75,0.18) 6(-8.75,-1.09) 7(-8.75,-2.36) 8(-8.75,-3.63) 9(-8.75,-4.9) 10(-8.75,-6.17) 11(-8.75,-7.44) 12(-8.75,-8.71) 13(-8.75,-9.98) 14(-8.75,-11.25) 15(8.75,-11.25) 16(8.75,-9.98) 17(8.75,-8.71) 18(8.75,-7.44) 19(8.75,-6.17) 20(8.75,-4.9) 21(8.75,-3.63) 22(8.75,-2.36) 23(8.75,-1.09) 24(8.75,0.18) 25(8.75,1.45) 26(8.75,2.72) 27(8.75,3.99) 28(8.75,5.26)
  rect 0.8x0.8 smd: 29_1(-2.755,0.79) 29_2(-1.505,0.79) 29_3(-0.255,0.79) 29_4(-2.755,-0.46) 29_5(-1.505,-0.46) 29_6(-0.255,-0.46) 29_7(-2.755,-1.71) 29_8(-1.505,-1.71) 29_9(-0.255,-1.71)
  round 0.35 hole 0.25 mask+0: 30_1(-2.13,0.79) 30_2(-0.88,0.79) 30_3(-2.755,0.165) 30_4(-1.505,0.165) 30_5(-0.255,0.165) 30_6(-2.13,-0.46) 30_7(-0.88,-0.46) 30_8(-2.755,-1.085) 30_9(-1.505,-1.085) 30_10(-0.255,-1.085) 30_11(-2.13,-1.71) 30_12(-0.88,-1.71)
  Keep-Out Layer region: 9,6.75 -9,6.75 -9,12.75 9,12.75
  silkscreen extent -10.1,-12.75 9,12.75
XDCR_ANT-LTE-CER-T [mm]
  rect 1.2x1.5 smd: 1(3.581,-2.159)
  rect 1.65x1.5 smd: 2(1.651,-2.159) 3(5.511,-2.159)
  rect 4x6 smd mask+0.102: 4(-18,0)
  rect 4x6 smd: 5(14.986,0)
  Keep-Out Layer region: 14.7,-2.524 6.35,-2.524 6.35,-1.524 0.82,-1.524 0.82,-2.524 -17.3,-2.524 -17.3,2.476 14.7,2.476
  Keep-Out Layer region: 16,-2.5 7.65,-2.5 7.65,-1.5 2.12,-1.5 2.12,-2.5 -16,-2.5 -16,2.5 16,2.5
  silkscreen extent -15.68,-2.5 15.68,2.5, body extent -19.94,-2.46 17.06,2.54, height 5.15

## Part data
"ANT DIV1": library part "Header 3", "Header, 3-Pin", LatestRevisionDate=17-Jul-2002, LatestRevisionNote="Re-released for DXP Platform.", Publisher="Altium Limited"
C1 C2 C9 C24: library part "CAP SMD 1206", "CAP 1206", Data=16-12-2016, Desc.="CAP SMD 1206", Designer="Abbas Basereh"
C3 C11 C12 C15 C18 C19 C20 C22: library part Cap-Bipolar, "Bipolar Capacitor", Voltage=100V, Adding Date=1387/12/20, Designer="Saeid Jorablo", Organazation=ControTec
C4 C5 C6 C7 C10: library part Cap-Polar, "Polar Capacitor", Voltage=16V, Adding Date=1387/12/20, Designer="Saeid Jorablo", Organazation=ControTec
C8 C13 C16 C17: library part LD055A561FAB2A, "T&R / COMMERCIAL CHIP", Package=None, Availability=Unavailable, MP=LD055A561FAB2A, Price=None
C14: library part CAP_Bipolar, "Bipolar Capacitor", Voltage=100V, Company="SJ Libraries", ComponentLink1Description=Datasheet, ComponentLink2Description=Reference, Designer="Eng. Saeid Jorablo", HelpURL=http://s3.picofile.com/file/7443264187/Coming_Soon_logo.gif, Publisher="SJ Unlimited", Status=Unreleased
C21 C23: library part "CAP SMD 1206", "10 V", Data=16-12-2016, Desc.="CAP SMD 1206", Designer="Abbas Basereh"
CN1: library part CON_Phoenix_MSTB_04, "4 Pitch: 5.08 mm Color: green Contact surface: Tin Assembly", Manufacturer="PHOENIX CONTACT", Max Current="12 A", Voltage="320 V", Category=Connector, ComponentLink1Description="Header, Nominal current: 12 A Rated voltage (III/2): 320 V Number of positions: 4 Pitch: 5.08 mm Color: green Contact surface: Tin Assembly: Soldering  DESIGNER:ABBAS BASEREH", ComponentLink2Description=Reference, Connector type="PCB Terminal Block", Designer="ABBAS BASEREH", Mounting Technology=Through-Hole, PART.NO=1759033, Pin Count=4, Positions=4, Revision 1=2017-3-1, Status=Unreleased
D1: library part "1n5822 SMD", "Schottky Rectifiers", Manufacturer="ON Semiconductor/Fairchild", Data=16-12-2016, Designer="Abbas Basereh", Link=https://www.aliexpress.com/item/Free-shipping-100pcs-1n5822-sma-smd-do-214ac-Schottky-diode-ss34/32337482329.html?spm=2114.01010208.3.1.zLZDsP&ws_ab_test=searchweb0_0,searchweb201602_4_10065_10068_10084_10083_10080_10082_10081_10060_10061_10062_10056_10055_10054_10059_10099_10078_10079_427_10073_10103_10102_10096_10052_10050_10051,searchweb201603_4&btsid=6e50dc92-ac69-45bc-a19e-209af19ce602, Part. No=SS34
D2 D3 D4 D6 D7 D8 D9 D10 D11 D13 D14 D15 D16 D17 D18 D19: "Diode ESD (Bi-directional)", Manufacturer_Name=Nexperia, Mouser Part Number=771-PESD5V0S1BL315, Arrow Part Number=PESD5V0S1BL,315, Arrow Price/Stock=https://www.arrow.com/en/products/pesd5v0s1bl315/nexperia, Datasheet Link=https://assets.nexperia.com/documents/data-sheet/PESD5V0S1BL.pdf, Height=0mm, Manufacturer_Part_Number=PESD5V0S1BL,315, Mouser Price/Stock=https://www.mouser.co.uk/ProductDetail/Nexperia/PESD5V0S1BL315?qs=LOCUfHb8d9vNKhGKXkjrvQ%3D%3D
D5 D12: "Diode Schottky 40 V 1A Surface Mount SOD-123", Package="SOD-123 Fairchild Semiconductor", Availability="In Stock", Check_prices=https://www.snapeda.com/parts/1N5819HW-7-F/Diodes+Inc./view-part/?ref=eda, MF="Diodes Inc.", MP=1N5819HW-7-F, Price=None, Purchase-URL=https://pricing.snapeda.com/search/part/1N5819HW-7-F/?ref=eda, SnapEDA_Link=https://www.snapeda.com/parts/1N5819HW-7-F/Diodes+Inc./view-part/?ref=snap
"ESP STATUS1" LED1 LED2 "NET MODE1" "NET STATUS1" STATUS1: library part LED, "5V OK", Adding Date=1387/12/22, Color=Red, Designer="Saeid Jorablo", Organazation=ControTec
  "ESP STATUS1" LED1 LED2 STATUS1: Size="SMD 1206"
  "NET MODE1": Size="NET MODE"
  "NET STATUS1": Size="NET STATUS"
F1 F2 F3: library part "Fuse 5x20 with holdeer pins", "Fuses 5x20", Data=28-12-2016, Desc.="fuse with holder pins 5x20", Designer="Abbas Basereh"
H1 H2: library part MOUNT-HOLE, "MOUNTING HOLE with drill center marker"
I/O1: "Header, 10-Pin", LatestRevisionDate=17-Jul-2002, LatestRevisionNote="Re-released for DXP Platform.", Publisher="Altium Limited"
JTAG1: "Header, 3-Pin", LatestRevisionDate=17-Jul-2002, LatestRevisionNote="Re-released for DXP Platform.", Publisher="Altium Limited"
L1: "Radial Inductor with Leads,8200ÂµH, 0.13A,Q>20", Package=None, Availability="In Stock", Check_prices=https://www.snapeda.com/parts/DRC-V-822K/Bel+Fuse/view-part/?ref=eda, MF="Bel Fuse", MP=DRC-V-822K, Price=None, Purchase-URL=https://pricing.snapeda.com/search/part/DRC-V-822K/?ref=eda, SnapEDA_Link=https://www.snapeda.com/parts/DRC-V-822K/Bel+Fuse/view-part/?ref=snap
L2: library part INDC_2u2_1210_1200mA, "Inductor 2.2uH 1.2A 1210 SMD chip", DC Resistance (DCR)="115 mOhm", Frequency - Self Resonant=68MHz, Frequency - Test=7.96MHz, Manufacturer 1="TDK Corporation", Manufacturer Part Number 1=NLCV32T-2R2M-PFR, Operating Temperature="-40°C ~ 125°C", Package / Case="1210 (3225 Metric)", Q @ Freq="15 @ 7.96MHz", Ratings="1.2 Adc", Supplier Part Number 1=445-3650-1-ND, Tolerance=±20%, ComponentLink1Description=http://www.tdk.co.jp/tefe02/e511_nlcv_nlc.pdf, ComponentLink1URL=http://www.tdk.co.jp/tefe02/e511_nlcv_nlc.pdf, SCDType=source, Supplier 1=Digi-Key, Type="Ferrite Core"
L3: library part INDC_2u2_1210_1200mA, DC Resistance (DCR)="115 mOhm", Frequency - Self Resonant=68MHz, Frequency - Test=7.96MHz, Manufacturer 1="TDK Corporation", Manufacturer Part Number 1=NLCV32T-2R2M-PFR, Operating Temperature="-40°C ~ 125°C", Package / Case="1210 (3225 Metric)", Q @ Freq="15 @ 7.96MHz", Ratings="1.2 Adc", Supplier Part Number 1=445-3650-1-ND, Tolerance=±20%, ComponentLink1Description=http://www.tdk.co.jp/tefe02/e511_nlcv_nlc.pdf, ComponentLink1URL=http://www.tdk.co.jp/tefe02/e511_nlcv_nlc.pdf, SCDType=source, Supplier 1=Digi-Key, Type="Ferrite Core"
"MAIN ANT1": "Cellular Multiband Monopole Ceramic Chip Antenna", Package=None, Availability="In Stock", Check_prices=https://www.snapeda.com/parts/ANT-LTE-CER-T/Linx%20Technologies%20Inc./view-part/2769557/?ref=eda, MF="Linx Technologies", MP=ANT-LTE-CER-T, Price=None, SnapEDA_Link=https://www.snapeda.com/parts/ANT-LTE-CER-T/Linx%20Technologies%20Inc./view-part/2769557/?ref=snap
"MICRO SD1": library part "CON_Micro SD", "Secure Digital Card Socket", Max Current=mA, Category=Connector, Company="SJ Libraries", ComponentLink1Description=Datasheet, ComponentLink2Description=Reference, Connector type=Header, Designer="Eng. Saeid Jorablo", HelpURL=http://s3.picofile.com/file/7443264187/Coming_Soon_logo.gif, Mounting Technology="Surface Mount", Pin Count=13, Publisher="SJ UnLimited", Status=Unreleased, Update=7/8/2012
"Power 1" "Power 2": "Header, 2-Pin", LatestRevisionDate=17-Jul-2002, LatestRevisionNote="Re-released for DXP Platform.", Publisher="Altium Limited"
"POWER SW1" "RESET SW1" "USB BOOT SW1": "Push Button Switch"
PowerOut1: "Header, 4-Pin", LatestRevisionDate=17-Jul-2002, LatestRevisionNote="Re-released for DXP Platform.", Publisher="Altium Limited"
Q1 Q4 Q5 Q6 Q7: "N-Channel 50V 220mA (Ta) 360mW (Ta) Surface Mount SOT-23-3", Package=None, Availability=Unavailable, MP=BSS138, Price=None
Q2 Q3: "BJT, SOT-23, 45V, 100mA, NPN, 0.25W, 150C", Package="SOT-23-3 Diotec", Check_prices=https://www.snapeda.com/parts/BC847B/Diotec/view-part/?ref=eda, MF="Diotec Semiconductor", MP=BC847B, SnapEDA_Link=https://www.snapeda.com/parts/BC847B/Diotec/view-part/?ref=snap
Q8 Q9: library part SMD-TRANSISTORS-NPN-25V-500MW(SOT-23), "305010017", Package=None, Availability=Unavailable, MP=S8050, Price=None
R1 R48: library part "RES 1206 0.25W", "RES 1206", Data=16-12-2016, Desc.="RES SMD 1206", Designer="Abbas Basereh"
R2 R3 R8 R9 R10 R13 R14 R15 R16 R17 R18 R21 R22 R23 R24 R25 R27 R28 R29 R30 R31 R32 R33 R34 R35 R36 R37 R38 R39 R40 R41 R42 R43 R44 R45 R46 R47 R49 R50 R51: library part "RES Axial 0.5W", "RES Axial 0.5W", Data=4-1-2017, Desc.="RES Axial 0.5W", Designer="Abbas Basereh"
R4 R5 R6 R7 R11 R12 R19 R20 R26: library part 2-2176053-0, "RES 0.33 OHM 1% 1/4W 0805", Package=0805, Power_Rating=".25 W", Resistance=.33, Tolerance=1%, Availability="In Stock", Check_prices=https://www.snapeda.com/parts/2-2176053-0/TE+Connectivity/view-part/?ref=eda, EU_RoHS_Compliance="Compliant with Exemptions", MF="TE Connectivity", MP=2-2176053-0, Price=None, SnapEDA_Link=https://www.snapeda.com/parts/2-2176053-0/TE+Connectivity/view-part/?ref=snap
SIM1: "Nano SIM Card Connector, Push-Pull Type, 6 Pin, SMT, Profile 1.35mm", Package=None, Availability=Unavailable, MP=SIM8051-6-0-14-00-X-REVD, Price=None
U1: "Integrated Circuit", Arrow Part Number=LM2596S-3.3/NOPB, Manufacturer_Name="Texas Instruments", Mouser Part Number=926-LM2596S-3.3/NOPB, Arrow Price/Stock=https://www.arrow.com/en/products/lm2596s-3.3nopb/texas-instruments?region=nac, Datasheet Link=http://www.ti.com/lit/ds/symlink/lm2596.pdf, Height=4.65mm, Manufacturer_Part_Number=LM2596S-3.3/NOPB, Mouser Price/Stock=https://www.mouser.co.uk/ProductDetail/Texas-Instruments/LM2596S-3.3-NOPB?qs=X1J7HmVL2ZHsEwG9Q6doow%3D%3D
U2: "Integrated Circuit", Manufacturer_Name=Microchip, Mouser Part Number=998-MIC29302WUTR, Arrow Part Number=MIC29302WU-TR, Arrow Price/Stock=https://www.arrow.com/en/products/mic29302wu-tr/microchip-technology?region=nac, Datasheet Link=http://ww1.microchip.com/downloads/en/DeviceDoc/20005685A.pdf, Height=4.597mm, Manufacturer_Part_Number=MIC29302WU-TR, Mouser Price/Stock=https://www.mouser.co.uk/ProductDetail/Microchip-Technology/MIC29302WU-TR?qs=U6T8BxXiZAWR9%2FgJIuiMuA%3D%3D
U3: "31V, 19V Clamp 19A _8/20Âµs_ Ipp Tvs Diode Surface Mount SOT-23-3", Package="SOT-23 Semtech", Availability=Unavailable, MF=Semtech, MP=SM712, Price=None, SnapEDA_Link=https://www.snapeda.com/parts/SM712/Semtech/view-part/4219095/?ref=snap
U4: "1/1 Transceiver Half RS422, RS485 8-SOIC", Package="SOIC-8 Maxim Integrated", Digi-Key_Part_Number=MAX485CSA+TCT-ND, Digi-Key_Purchase_URL=https://www.digikey.com/product-detail/en/maxim-integrated/MAX485CSA-T/MAX485CSA-TCT-ND/3894816?utm_source=snapeda&utm_medium=aggregator&utm_campaign=symbol, MF="Maxim Integrated", MP=MAX485, SnapEDA_Link=https://www.snapeda.com/parts/MAX485/Maxim%20Integrated/view-part/493689/?ref=snap
U5: "Multiprotocol Modules ESP32-C6 module, Wi-Fi 6 in 2.4 GHz band, Bluetooth 5, Zigbee 3.0 and Thread. ESP34-WROOM Compatible - ENGINEERING SAMPLE", Package=None, Check_prices=https://www.snapeda.com/parts/ESP32-C6-WROOM-1-N8/Espressif+Systems/view-part/?ref=eda, MF="Espressif Systems", MP=ESP32-C6-WROOM-1-N8, SnapEDA_Link=https://www.snapeda.com/parts/ESP32-C6-WROOM-1-N8/Espressif+Systems/view-part/?ref=snap
U6: "8-bit bidirectional voltage-level shifter for open-drain and push-pull application", Package="TSSOP-20 Texas Instruments", Availability="In Stock", Check_prices=https://www.snapeda.com/parts/TXS0108EPWR/Texas+Instruments/view-part/?ref=eda, MF="Texas Instruments", MP=TXS0108EPWR, Price=None, Purchase-URL=https://pricing.snapeda.com/search/part/TXS0108EPWR/?ref=eda, SnapEDA_Link=https://www.snapeda.com/parts/TXS0108EPWR/Texas+Instruments/view-part/?ref=snap
U7: library part CH340, "CH340 USB 2.0 to UART Interface Evaluation Board", Package=None, Availability=Unavailable, MF=DFRobot, MP=CH340, Price=None, SnapEDA_Link=https://www.snapeda.com/parts/CH340/DFRobot/view-part/53354/?ref=snap
U8: "Integrated Circuit", Manufacturer_Name=Quectel, Mouser Part Number=277-EC2UCNAAN05SGNSA, Datasheet Link=https://www.evelta.com/content/datasheets/027-EC200UCNAA.pdf, Height=2.6mm, Manufacturer_Part_Number=EC200UCNAA-N05-SGNSA, Mouser Price/Stock=https://www.mouser.co.uk/ProductDetail/Quectel/EC200UCNAA-N05-SGNSA?qs=vvQtp7zwQdNfIz65%252BTj4jQ%3D%3D
USB1 USB2: library part 10155435-00011LF, Package=None, Availability=Unavailable, MF="Amphenol ICC (FCI)", MP=10155435-00011LF, Price=None
Y1: library part XTAL, "XTAL Crystal", ComponentLink1Description=Datasheet, ComponentLink2Description=Reference, Design Date=2017-1-3, Designer="ABBAS BASEREH", Mounting Technology="Surface Mount\Through-Hole", Status=Unreleased

## Free pads (board coordinates)
  round 1 hole 0.5 mask+0.102: 2(149.352,109.093) 4(149.86,109.982) 6(119.38,111.125) 7(119.761,110.363) 8(118.618,111.887) 9(118.999,110.617) 10(121.793,112.395) 11(124.206,112.903) 12(123.19,112.649) 13(123.19,112.649) 14(122.428,112.776) 15(124.079,108.585) 16(124.333,107.823) 17(117.729,111.76) 18(118.745,111.125) 19(119.888,110.998) 20(118.11,111.252) 21(143.383,53.213) 22(143.764,53.721) 23(143.51,54.229) 24(143.002,54.356) 25(142.748,53.975) 26(142.875,53.594) 27(142.875,53.086) 28(149.098,118.364) 29(149.479,117.856) 30(148.717,117.856) 31(148.971,117.475) 33(149.987,117.983) 34(149.352,117.475) 35(149.352,110.744) 36(149.225,109.982) 37(150.368,109.474) 38(150.368,110.236) 39(149.606,111.252) 40(150.05,108.902) 41(157.48,100.33) 42(157.861,99.949) 43(169.545,91.948) 44(169.545,91.44) 45(169.545,90.932) 46(169.545,90.297) 47(163.957,71.374) 48(164.211,70.993) 49(163.83,70.993) 50(164.084,70.612) 51(163.83,70.231) 52(164.211,69.977) 53(163.83,69.85) 55(112.776,108.331) 56(113.411,108.331) 57(113.792,107.823) 58(113.157,107.569) 59(112.776,107.315) 60(113.792,108.966) 61(124.968,114.808) 62(125.476,114.046) 63(124.841,113.919) 64(126.111,113.919) 65(102.108,72.009) 66(101.854,72.517) 67(101.727,71.882) 68(101.727,71.374) 69(102.616,71.628) 70(101.727,70.866) 71(102.235,70.739) 72(108.204,51.562) 73(108.839,50.673) 74(109.093,51.308) 75(108.712,51.562) 76(108.712,52.07) 77(108.204,52.324)

## Via types
v1: diameter 1, hole 0.5, Top Layer to Bottom Layer, tented both sides, 126 vias
v2: diameter 0.5, hole 0.2, Top Layer to Bottom Layer, tented both sides, 3 vias

## Nets (pads, with @x,y where several pads share a name; then routed paths per layer and width w, separated by ;. In a path a pad name is that pad's centre, name@x,y a point inside that pad or via, vN(x,y) a via of type N, cw(c..) or ccw(c..) an arc to the next point about the centre after c; other vN are vias at no path point)
3.8V: "NET MODE1.1" "NET STATUS1.1" C1.2 C7.1 C20.2 LED1.1 pad.61 pad.62 pad.63 pad.64 pad.65 pad.66 pad.67 pad.68 pad.69 pad.70 pad.71 pad.72 pad.73 pad.74 pad.75 pad.76 pad.77 R1.2 R37.2 R44.2 STATUS1.1 U2.4 U8.57 U8.58 U8.59 U8.60 | length 181.2
  Top Layer w1.2: 106.426,95.504 114.62,95.504 116.586,97.47 122.669,97.47 128.765,103.566 131.243,103.566 134.109,106.432 C7.1@138.811,106.432
  Top Layer w1.5: v1(102.235,71.247) 102.235,80.264 105.481,83.51 105.481,94.484 106.426,95.429 106.426,95.504 ; R1.2@104.856,46.863 104.856,47.579 v1(108.39,51.113) 110.039,51.113 C1.2@110.733,50.419 ; U2.4@120.431,117.159 120.431,114.917 121.008,114.34 126.23,114.34 127.841,115.951 ; 137.668,117.221 138.801,118.354 LED1.1@138.801,129.286
  Top Layer w2: 127.841,115.951 129.111,117.221 137.668,117.221 142.338,117.221 143.51,116.049 143.51,108.106 142.338,106.934 138.811,106.934 C7.1@138.811,106.432
  Bottom Layer w1: U8.57@104.28,66.593 103.761,66.593 103.13,65.962 103.13,60.948 108.39,55.688 v1(108.39,51.113)
  Bottom Layer w1.5: v1(102.235,71.247) 102.653,71.247 103.407,70.493 ; U8.57@104.28,66.593 U8.58@104.28,67.893 U8.59@104.28,69.193 U8.60@104.28,70.493 ; C20.2@122.947,111.125 124.916,111.125 126.085,112.294 ; v1(124.714,114.3) 124.867,114.3 126.479,112.688 128.189,114.398 R44.2@128.189,115.316 ; 128.862,115.484 129.462,116.084 129.462,116.124 132.083,118.745 R37.2@132.415,118.745 ; LED1.1@138.801,129.286 138.961,129.286 140.561,127.686 141.887,127.686 143.487,129.286 143.627,129.286 145.227,127.686 146.98,127.686 STATUS1.1@148.58,129.286 149.149,128.717 149.149,128.623 150.086,127.686 151.412,127.686 153.012,129.286 153.152,129.286
3V3: "ESP STATUS1.1" "MICRO SD1.4" C5.1 C10.1 C12.2 C13.1 C16.1 C19.2 L1.1 LED2.1 pad.2 pad.4 pad.28 pad.29 pad.30 pad.31 pad.33 pad.34 pad.35 pad.36 pad.37 pad.38 pad.39 pad.40 pad.41 pad.42 pad.43 pad.44 pad.45 pad.46 pad.47 pad.48 pad.49 pad.50 pad.51 pad.52 pad.53 pad.55 pad.56 pad.57 pad.58 pad.59 pad.60 PowerOut1.1 Q4.1 Q5.1 Q6.1 R9.1 R10.1 R16.1 R20.2 R26.1 R28.2 R29.2 R30.2 R31.2 U1.4 U5.2 U6.19 U7.4 U7.16 | length 280.4
  Top Layer w0.5: pad.42@157.92,100.214 U6.19@159.69,100.214
  Top Layer w1: U1.4@107.872,118.387 107.897,118.362 107.897,115.877 108.204,115.57 ; PowerOut1.1@136.271,61.595 136.271,63.627 137.668,65.024 150.544,65.024 151.13,65.61 151.13,67.465 150.874,67.721 150.874,68.201 Q4.1@150.749,68.326 150.795,68.372 R9.1@150.795,70.358 R10.1@150.795,72.136 ; Q5.1@150.871,75.946 151.384,76.459 151.384,79.883 Q6.1@150.876,80.391 ; Q5.1@151.021,75.821 151.021,75.316 151.049,75.288 151.049,73.279 ; R10.1@151.049,72.136 151.049,73.279 ; v1(157.453,99.922) 157.226,100.149 157.226,100.33 v1(157.099,100.457) 157.334,100.457 157.92,99.871 v1(157.92,99.455) 158.957,98.418 165.077,98.418 166.064,97.431 169.022,97.431 169.608,98.017 169.608,98.731 C13.1@169.683,98.806 ; C12.2@163.714,59.69 163.714,62.981 163.381,63.314 ; 164.084,65.142 164.084,69.977 pad.50@164.084,70.612 164.084,70.993 v1(164.084,71.835) ; U7.4@166.661,66.548 166.511,66.398 165.467,66.398 164.211,65.142 164.211,64.144 163.381,63.314 ; v1(169.545,92.329) 169.679,92.463 U5.2@169.679,94.593 ; U5.2@169.672,94.843 169.722,94.893 169.722,95.457 169.842,95.577 169.842,95.965 170.904,97.027 171.276,97.027 171.675,97.426 171.802,97.426 ; 151.049,73.279 153.799,73.279 154.986,72.092 R16.1@154.986,71.882 154.986,71.672 155.113,71.545 155.113,68.243 160.468,62.888 161.611,62.888 U7.16@161.761,62.738 161.911,62.888 162.955,62.888 163.381,63.314
  Top Layer w1.2: pad.4@149.86,109.982 149.86,109.093 pad.40@150.05,108.902 pad.40@150.241,108.712 ; C10.1@152.981,113.969 152.981,114.239 156.855,114.239 156.955,114.139 157.334,114.139 158.737,114.139 ; C13.1@169.683,98.806 169.708,98.831 C13.1@169.708,98.931 ; C13.1@169.742,98.956 170.864,100.078 C16.1@171.795,100.078 ; 171.802,97.426 C16.1@171.802,100.078
  Top Layer w1.5: 149.479,114.046 149.479,113.635 150.549,112.565 151.709,112.565 ; pad.4@149.86,109.982 149.86,110.716 151.709,112.565 ; C10.1@152.981,113.969 151.709,112.697 151.709,112.565
  Top Layer w2: 108.204,115.57 108.458,115.316 111.633,115.316 115.744,111.205 115.744,108.851 121.539,103.056 C5.1@121.539,102.656 ; L1.1@113.244,109.855 113.244,108.966 113.244,107.569 113.244,104.688 115.187,102.745 C5.1@121.339,102.745 ; 149.479,114.046 149.225,114.3 149.225,117.948 v1(149.775,118.498)
  Bottom Layer w1: v1(164.084,71.835) 164.084,75.554 169.672,81.142 169.672,90.932 169.672,92.202 v1(169.545,92.329)
  Bottom Layer w1.2: pad.2@149.352,109.093 149.86,109.093 pad.40@150.05,108.902 150.241,108.712 R31.2@150.241,107.569 ; R31.2@150.603,107.469 150.603,107.112 150.576,107.085 R28.2@150.576,105.791 150.576,105.221 153.691,102.106 C19.2@154.269,102.106 ; C19.2@154.319,101.856 154.769,101.406 154.769,100.945 156.715,98.999 ; R26.1@157.053,91.821 156.953,91.921 156.953,91.931 156.464,92.42 156.464,98.748 156.715,98.999 ; 157.326,99.06 156.776,99.06 156.715,98.999
  Bottom Layer w2: pad.58@113.157,107.569 113.244,107.656 113.244,108.966 L1.1@113.244,109.855 ; L1.1@113.304,110.129 113.304,116.606 121.094,124.396 ; LED2.1@133.721,129.286 133.168,129.839 133.168,130.052 132.084,131.136 127.834,131.136 126.828,130.13 126.813,130.13 126.066,129.383 126.066,129.368 121.094,124.396 ; v1(149.775,118.498) R29.2@150.53,119.253 150.391,119.392 150.391,121.478 150.403,121.49 R30.2@150.403,121.92 150.403,122.35 150.114,122.639 150.114,123.825 121.666,123.825 121.094,124.396 ; 150.114,124.079 153.111,124.079 158.105,129.073 158.105,129.286
  other v1: 150.114,110.871
5V: "Power 1.2" C3.2 C4.1 C6.1 C9.2 C11.2 C22.2 F1.2 F3.2 pad.6 pad.7 pad.8 pad.9 pad.17 pad.18 pad.19 pad.20 pad.21 pad.22 pad.23 pad.24 pad.25 pad.26 pad.27 PowerOut1.2 R8.2 R14.1 R17.1 R18.1 U1.1 U2.1 U2.2 U4.8 | length 309.7
  Top Layer w1: U2.1@115.091,117.399 115.091,117.631 115.101,117.641 116.781,117.641 116.791,117.631 U2.2@116.791,117.399
  Top Layer w1.5: v1(143.256,53.848) 143.256,53.975 144.907,55.626 R8.2@146.766,55.626 ; R8.2@146.761,55.631 146.761,57.491 C9.2@146.928,57.658 146.928,59.278 147.807,60.157 151.04,60.157 152.103,61.22 152.103,61.76 R14.1@152.573,62.23 156.559,58.244 156.559,50.289 ; U4.8@153.862,50.546 154.003,50.405 155.597,50.405 155.837,50.165 156.683,50.165 157.713,49.135 157.833,49.015 163.358,49.015 164.768,50.425 164.768,52.445 164.168,53.045 162.568,53.045 161.498,51.975 R17.1@161.498,51.435
  Top Layer w1.524: C4.1@101.854,106.178 C4.1@101.854,107.178 ; U1.1@102.855,117.749 102.855,116.567 104.521,114.901 104.521,108.845 103.092,107.416
  Top Layer w1.8: 119.537,99.906 122.674,99.906 128.2,105.432 128.341,105.432
  Top Layer w2: 93.472,114.808 93.472,110.973 92.965,110.466 92.965,106.632 93.932,105.665 101.854,105.665 C4.1@101.854,106.178 C4.1@101.854,106.426 ; 103.092,106.426 107.517,106.426 112.141,101.802 F1.2@112.141,100.946 112.492,100.595 C3.2@115.57,100.595 118.848,100.595 119.537,99.906 ; U2.1@115.091,117.399 115.581,116.909 115.581,114.536 118.11,112.007 118.11,111.887 118.237,111.887 pad.7@119.761,110.363 ; pad.19@119.761,110.608 125.558,110.608 126.73,109.436 ; 127.765,108.715 129.048,107.432 130.048,107.432 130.048,105.432 128.341,105.432 ; PowerOut1.2@136.271,59.055 134.99,59.055 133.731,57.796 133.731,53.828 135.484,52.075 137.438,52.075 138.1,52.737 142.145,52.737 v1(143.256,53.848) ; 162.568,53.295 163.714,54.441 C11.2@163.714,57.15 163.841,57.023 R18.1@166.07,57.023 165.881,57.212 F3.2@165.881,60.071
  Bottom Layer w2: C22.2@117.359,110.49 117.486,110.617 pad.9@118.999,110.617 ; 118.56,109.289 118.11,108.839 117.983,108.839 117.983,105.918 116.332,104.267 106.963,104.267 106.868,104.361 101.323,104.361 100.09,105.594 93.326,105.594 92.314,104.582 92.314,55.859 95.461,52.712 104.459,52.712 111.834,45.337 143.606,45.337 145.542,47.273 145.542,51.562 v1(143.256,53.848)
12V: "Power 2.2" F2.2 PowerOut1.3 | length 23.7
  Top Layer w2: 150.622,46.228 150.749,46.355 F2.2@153.562,46.355
  Bottom Layer w2: PowerOut1.3@136.271,56.515 143.865,56.515 149.127,51.252 149.127,50.79 150.241,49.676 150.241,46.609 150.622,46.228
ADC1: I/O1.9 U5.27 | length 48
  Top Layer w0.5: v1(158.857,72.517) 158.864,72.524 160.107,72.524 160.887,73.304 168.906,73.304 169.672,74.071 U5.27@169.672,77.343
  Bottom Layer w0.5: I/O1.9@136.271,73.152 135.121,72.002 135.121,70.136 135.795,69.462 138.102,69.462 146.618,77.978 151.511,77.978 156.876,72.613 158.761,72.613 v1(158.857,72.517)
ANT_DIV: "ANT DIV1.3" U8.35 | length 18.3
  Bottom Layer w0.4: 129.794,48.387 129.794,55.443 132.13,57.779 132.13,64.543 131.38,65.293 U8.35@131.28,65.293
ANT_GNSS: C2.1 U8.47 | length 14.7
  Top Layer w0.508: C2.1@116.851,50.419 116.851,62.749 v1(117.348,63.246)
  Bottom Layer w0.508: v1(117.348,63.246) 117.364,63.23 117.364,61.559 U8.47@117.38,61.543
ANT_MAIN: C21.2 C24.2 R48.1 | length 27.8
  Top Layer w0.3: v1(101.727,67.31) 108.077,60.96 v1(108.077,58.166)
  Bottom Layer w0.3: C24.2@101.727,63.638 v1(101.727,67.31) ; v1(108.077,58.166) 108.331,58.42 R48.1@109.682,58.42 109.682,58.21 110.482,57.41 116.803,57.41 117.813,58.42 C21.2@119.369,58.42
CHIP_PU: C17.1 R12.1 R20.1 U5.3 | length 34.2
  Top Layer w0.4: R20.1@173.655,98.298 173.782,98.171 175.095,98.171 v1(175.114,98.19)
  Top Layer w0.5: R12.1@150.758,87.376 160.346,87.376 166.061,93.091 v1(168.529,93.091) 168.465,93.154 168.465,94.78 U5.3@168.402,94.843
  Bottom Layer w0.267: C17.1@167.016,91.948 167.016,92.098 167.835,92.917 168.355,92.917 v1(168.529,93.091)
  Bottom Layer w0.4: v1(168.529,93.091) 173.628,98.19 v1(175.114,98.19)
DTR: Q3.2 R5.2 U7.13 | length 36.1
  Top Layer w0.5: R5.2@139.976,83.82 R5.2@140.186,83.82 ; Q3.2@142.748,83.317 142.698,83.317 142.195,83.82 R5.2@140.186,83.82 ; U7.13@161.761,66.548 160.861,66.548 156.563,70.846 156.563,73.446 153.582,76.427 153.582,80.004 151.619,81.966 148.183,81.966 147.486,81.269 144.534,81.269 144.231,81.572 142.075,81.572 140.436,83.211 140.436,83.57 R5.2@140.186,83.82
ESP_GPS_RX: U6.18 U8.68 | length 70
  Top Layer w0.4: v1(105.664,81.407) 107.448,83.191 107.448,90.574 111.428,94.554 115.014,94.554 116.218,95.758 122.301,95.758 124.8,98.257 126.197,98.257 130.556,102.616 136.82,102.616 136.834,102.63 146.128,102.63 146.763,101.995 v1(146.925,101.995) ; v1(152.508,101.522) 157.519,101.522 158.177,100.864 U6.18@159.674,100.864
  Bottom Layer w0.4: U8.68@104.28,80.893 105.277,80.893 105.664,81.28 v1(105.664,81.407) ; v1(146.925,101.995) 146.965,101.995 147.459,102.489 151.634,102.489 152.508,101.616 v1(152.508,101.522)
ESP_GPS_TX: U6.17 U8.67 | length 71.3
  Top Layer w0.4: v1(105.791,79.883) 107.998,82.09 107.998,90.346 111.656,94.004 115.241,94.004 116.233,94.996 122.428,94.996 124.834,97.402 124.834,97.429 125.112,97.707 126.641,97.707 131,102.066 137.048,102.066 137.062,102.08 145.638,102.08 146.879,100.839 v1(146.879,100.719) ; v1(150.749,101.6) 150.761,101.6 151.533,102.372 157.447,102.372 158.305,101.514 U6.17@159.69,101.514
  Bottom Layer w0.4: U8.67@104.28,79.593 105.501,79.593 v1(105.791,79.883) ; v1(146.879,100.719) 147.765,101.605 150.744,101.605 v1(150.749,101.6)
ESP_MAIN_RX: U5.24 U7.2 | length 17
  Top Layer w0.5: U5.24@165.862,77.343 165.862,75.827 v1(165.923,75.767) ; U7.2@166.661,64.008 v1(168.91,64.008)
  Bottom Layer w0.5: v1(165.923,75.767) 165.923,75.631 166.578,74.976 166.578,74.854 166.88,74.552 166.88,65.782 168.653,64.008 v1(168.91,64.008)
ESP_MAIN_TX: U5.25 U7.3 | length 15.1
  Top Layer w0.5: U7.3@166.661,65.278 167.615,65.278 167.742,65.151 v1(168.783,65.151) ; v1(167.132,75.946) U5.25@167.132,77.343
  Bottom Layer w0.5: v1(167.132,75.946) 167.228,75.85 167.228,75.123 167.53,74.821 167.53,66.404 v1(168.783,65.151)
ESP_STATUS_1: R25.2 U5.21 | length 11.2
  Top Layer w0.5: v1(157.226,84.709) 162.052,79.883 U5.21@162.052,77.343
  Bottom Layer w0.5: R25.2@157.18,86.487 157.203,86.464 157.203,84.732 v1(157.226,84.709)